# Altium PCB Buck_Converter.PcbDoc (part 1 of 2)
Units mm, origin at the board's own origin, x right, y up, seen from the top; angles counter-clockwise.
Board outline 33.25 x 45.75 mm, 2 copper layers (Top Layer, Bottom Layer); 30 components, 13 nets, 71 pads, 22 vias.
Unrouted connection lines stored in the file: 25.
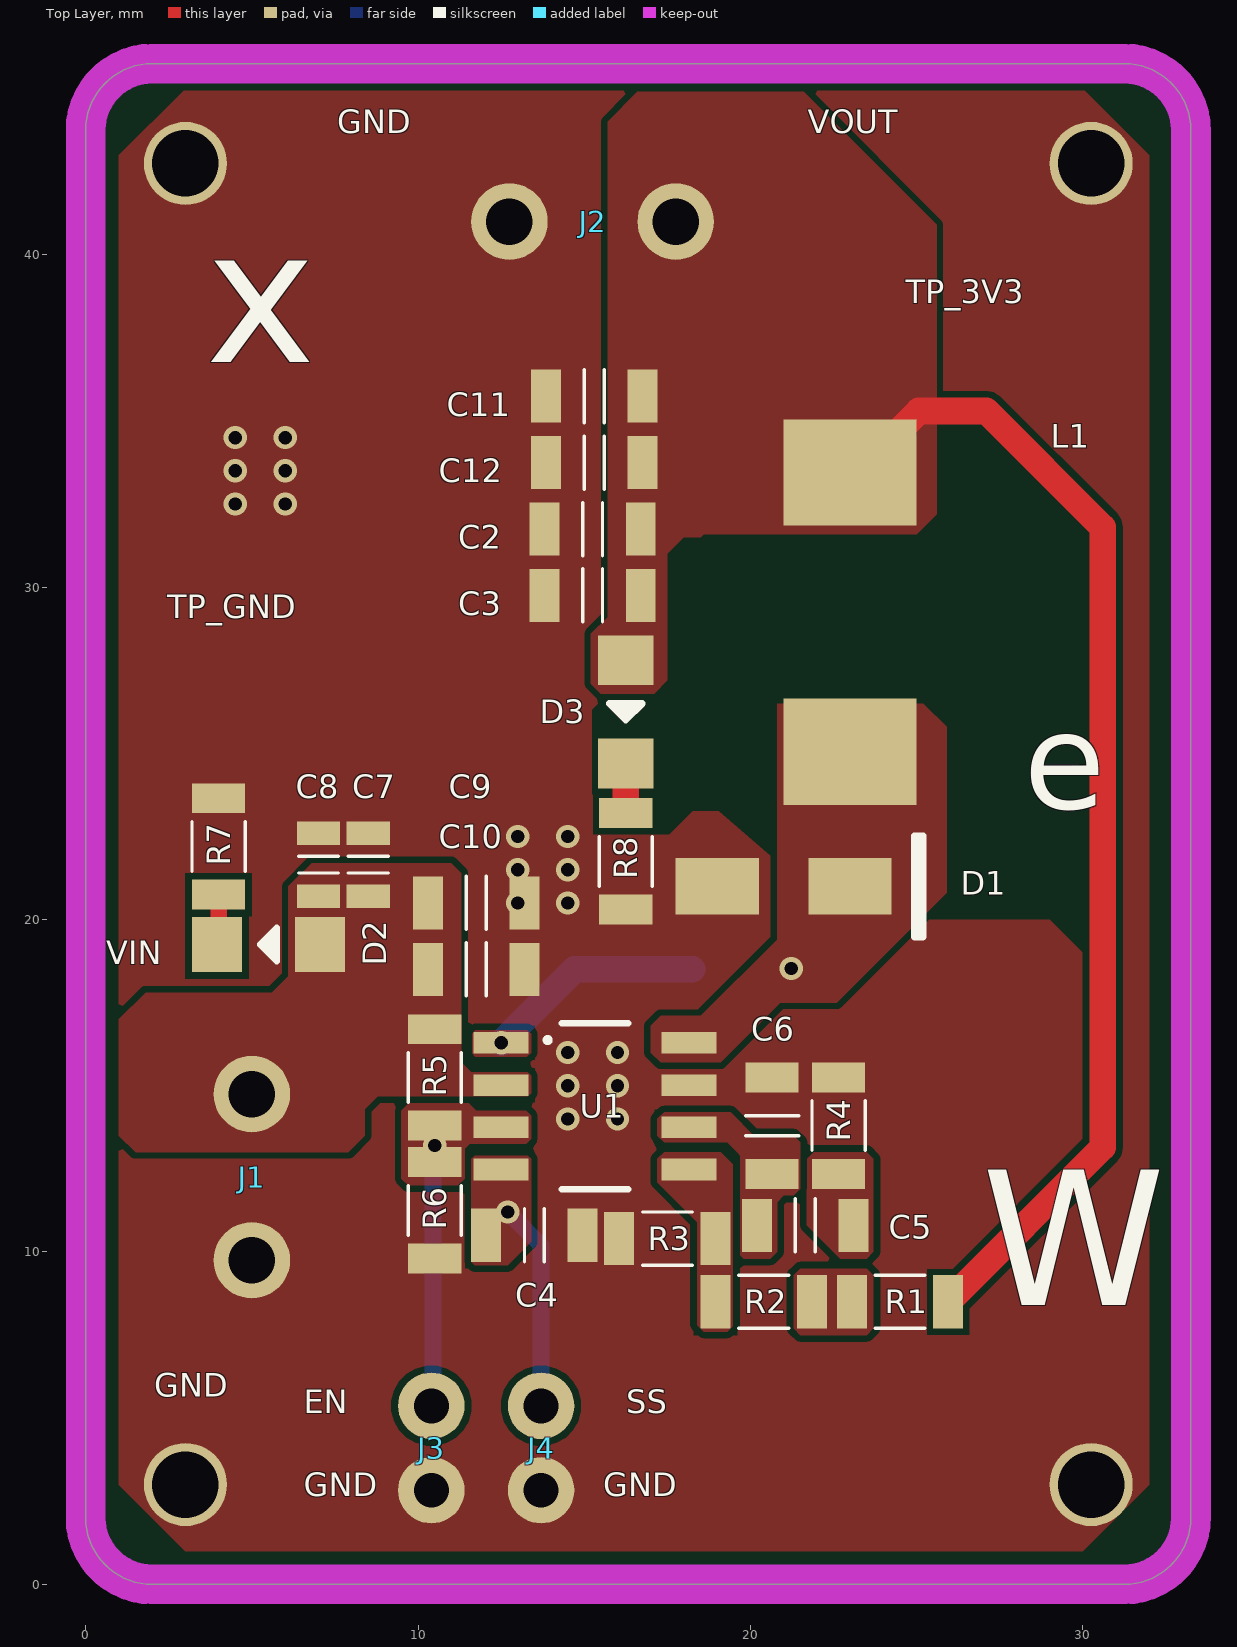
[diagram p0: Top Layer view]
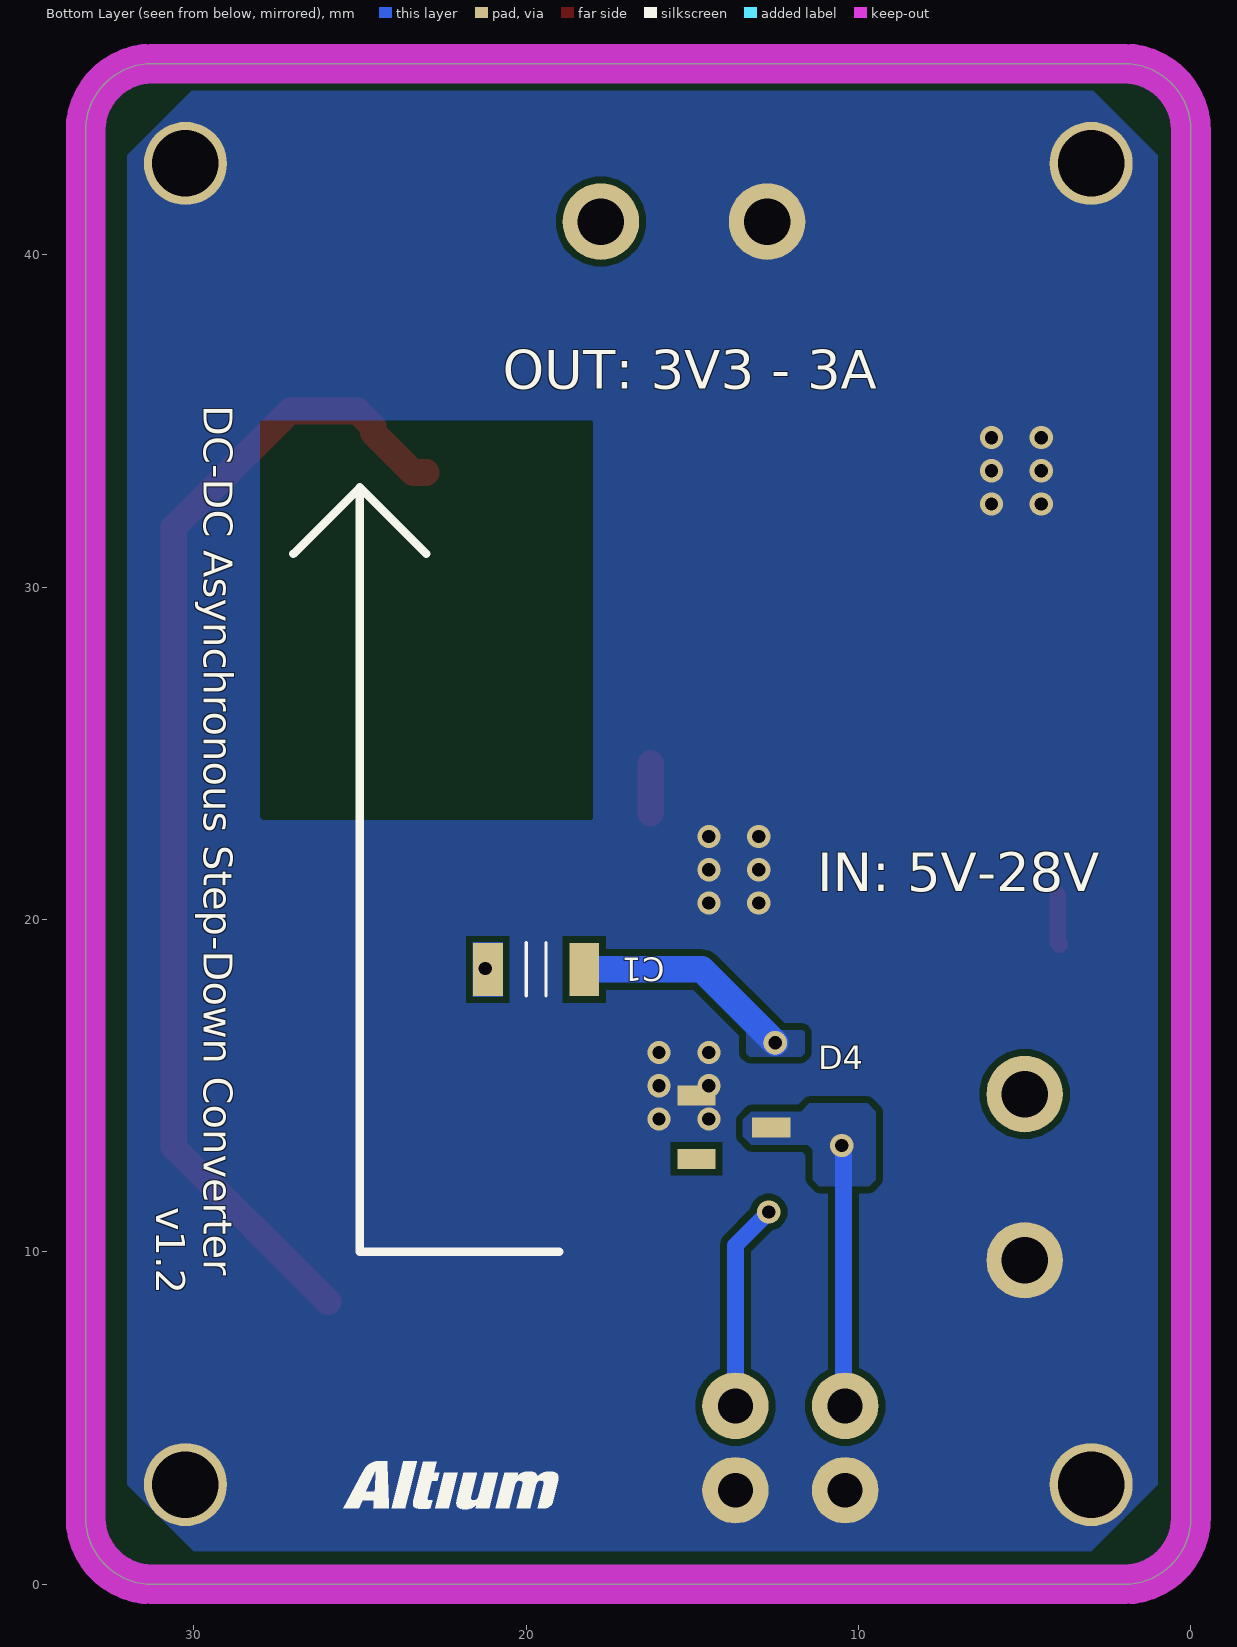
[diagram p1: Bottom Layer view, seen from below]
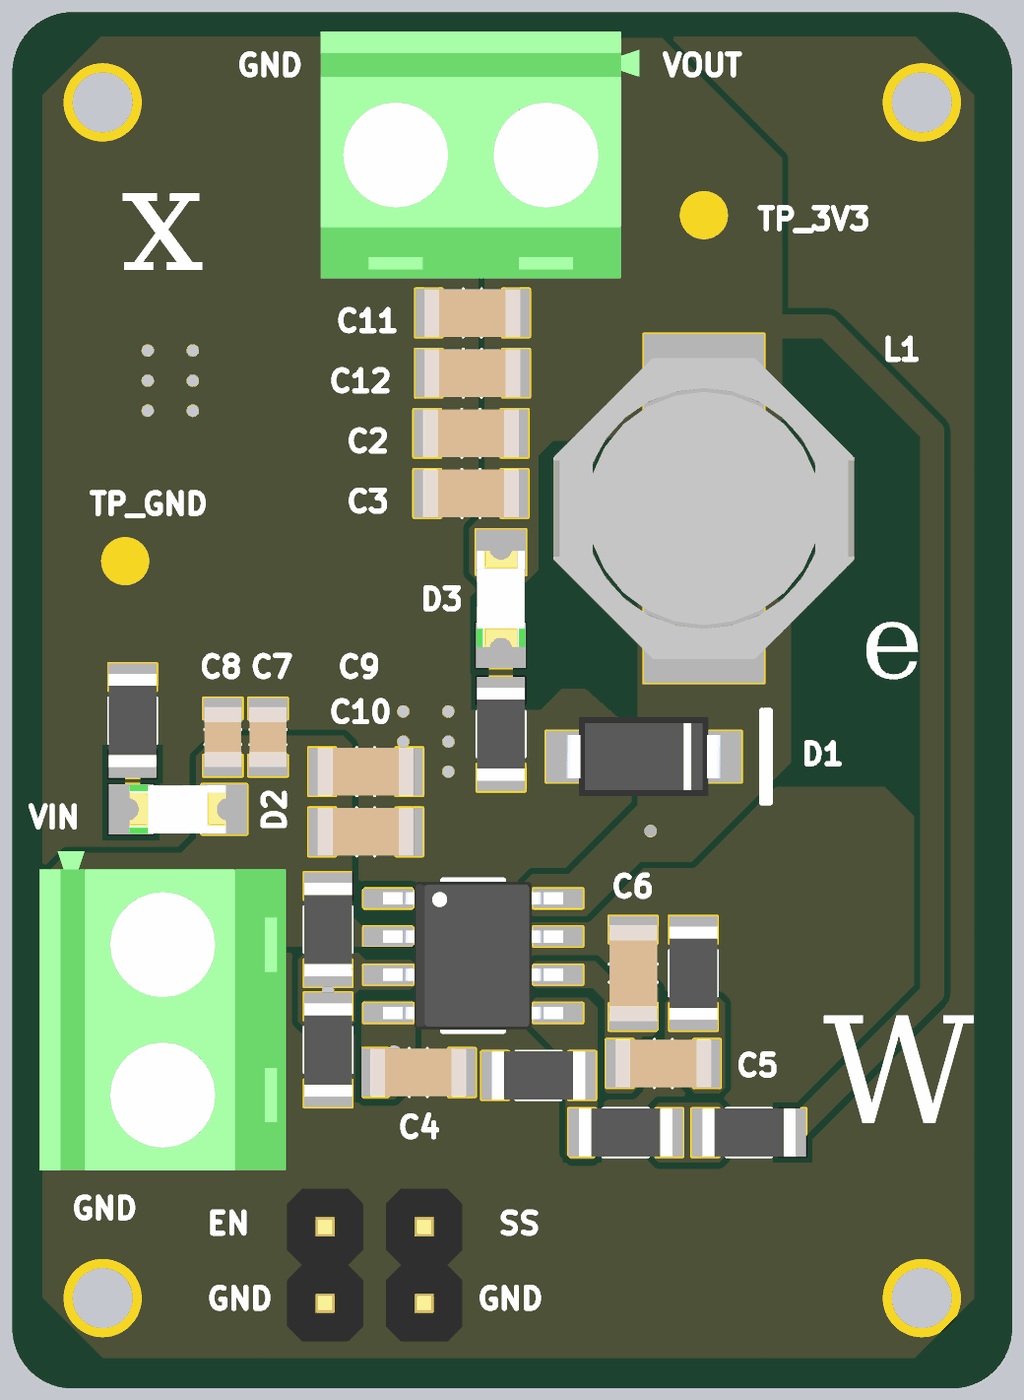
[diagram p2: 3D render of the assembled board from above, using the file's embedded part models]

## Layer stack, top to bottom
Top Solder: solder mask 0.0102, Solder Resist, Dk 3.5
Top Layer: signal copper 0.0356
Dielectric 1: dielectric 0.32, FR-4, Dk 4.8
Bottom Layer: signal copper 0.0356
Bottom Solder: solder mask 0.0102, Solder Resist, Dk 3.5

## Board outline
0,2 0,43.75 cw(c2,43.75) 2,45.75 31.25,45.75 cw(c31.25,43.75) 33.25,43.75 33.25,2 cw(c31.25,2) 31.25,0 2,0 cw(c2,2)

## Design rules (kind name [scope] priority, off if disabled: settings)
Clearance [All] p1: gap=0.2 ignorepadtopadclearanceinfootprint=FALSE except(0.35: Arc-THPad Track-THPad)
ComponentClearance [All] p1: gap=0 collisioncheckmode=3 verticalgap=0 showdistances=FALSE donotcheckwithout3dbody=TRUE
HoleSize [All] p1: absolutevalues=TRUE maxlimit=6.3 minlimit=0.15 maxpercent=80.000 minpercent=20.000
MinimumAnnularRing [All] p1: minimumring=0.15
MinimumSolderMaskSliver [All] p1: minsoldermaskwidth=0.1
PlaneClearance [All] p1: clearance=0.3
PlaneConnect [All] p1: planeconnectstyle=Direct reliefexpansion=0.508 reliefentries=4 reliefconductorwidth=0.254 reliefairgap=0.254
PolygonConnect [All] p1: connectstyle=Direct reliefconductorwidth=0.254 reliefentries=4 polygonreliefangle="90 Angle" airgapwidth=0.254
RoutingVias [All] p1: holewidth=0.5 width=0.65 viastyle="Through Hole" minholewidth=0.2 minwidth=0.35 maxholewidth=2 maxwidth=0.35
SilkToSilkClearance [All] p1: silktosilkclearance=0.3
SilkToSolderMaskClearance [IsPad] p1: minsilkscreentomaskgap=0.2 clearancetoexposedcopper=TRUE
SolderMaskExpansion [All] p1: expansion=0.05 istentingtop=FALSE
UnRoutedNet [All] p1: checkbadconnections=TRUE
Width [All] p1: maxlimit=50 minlimit=0.16 preferedwidth=10 minimp=50.000000 maximp=50.000000 favimp=50.000000
22 further rules are at their usual default settings.

## Components (designator, comment, footprint, x,y, rotation, side; value= is the part's Value field where it differs from the comment)
C1 "C1206C104J5RAC7800" CAP_1206 19.7,18.5 r0 bottom
C2 "GMC31X5R476M25NT" CAP_1206 15.25,31.75 r0 top
C3 "GMC31X5R476M25NT" CAP_1206 15.25,29.75 r0 top
C4 "C3216C0G2J103J160AA" CAP_1206 13.5,10.5 r180 top
C5 "C3216C0G2J102J085AA" CAP_1206 21.65,10.8 r180 top
C6 "C1206C470J5GAC7800" CAP_1206 20.65,13.8 r270 top
C7 "CL21A475KAQNNNE" CAP_0805 8.5,21.65 r270 top
C8 "CL21A475KAQNNNE" CAP_0805 7,21.65 r270 top
C9 "C1206C104J5RAC7800" CAP_1206 11.75,20.5 r180 top
C10 "C3216C0G2J103J160AA" CAP_1206 11.75,18.5 r180 top
C11 "C1206C104J5RAC7800" CAP_1206 15.3,35.75 r0 top
C12 "C3216C0G2J103J160AA" CAP_1206 15.3,33.75 r0 top
D1 "B340AE-13" SMA 21,21 r0 top
D2 "150120BS75000" LED_BLUE_1206 5.5,19.25 r0 top
D3 "150120GS75000" LED_GREEN_1206 16.25,26.25 r90 top
D4 "DIODE ZENER 5.1V 300MW SOT23" SOT-23 13.75,13.75 r180 bottom
J1 "282836-2" TERMINAL 5,12.25 r90 top
J2 "282836-2" TERMINAL 15.25,41 r0 top
J3 "2x1 Male Header 2.54mm" "2x1 Male Header 2.54mm" 10.4,4.1 r90 top
J4 "2x1 Male Header 2.54mm" "2x1 Male Header 2.54mm" 13.7,4.1 r90 top
L1 "SRI1004" IND_1010 23,29.25 r90 top
R1 "PMR18EZPJ000" RES_1206 24.5,8.5 r0 top
R2 "RC1206FR-0710K2L" RES_1206 20.4,8.5 r0 top
R3 "RC1206FR-073K24L" RES_1206 17.5,10.4 r0 top
R4 "RES 33K OHM 5% 1/4W 1206" RES_1206 22.65,13.8 r270 top
R5 "RC1206JR-07100KL" RES_1206 10.5,15.25 r90 top
R6 "RES 47K OHM 5% 1/4W 1206" RES_1206 10.5,11.25 r90 top
R7 "RC1206JR-0710KL" RES_1206 4,22.2 r270 top
R8 "RC1206JR-0710KL" RES_1206 16.25,21.75 r90 top
U1 "IC REG BUCK ADJ 3A 8SOIC" SOIC8_PAD 15.325,14.385 r0 top

## Footprints (in the part's own frame and the unit in brackets; to place one, negate y for a bottom-side part, rotate by r counter-clockwise, add the part's x,y. Pads: shape width x height; smd on the part's side, far side on the other; paste and mask are expansions set on the pad)
"2x1 Male Header 2.54mm" [mm]
  round 2 hole 1.05 mask+0.05: 1(-1.27,0) 2(1.27,0)
  body extent -2.54,-1.27 2.54,1.27, height 8.54
CAP_0805 [mm]
  rect 0.7x1.3 smd mask+0.05: 1(-0.95,0) 2(0.95,0)
  silkscreen extent -0.25,-0.6 0.25,0.6, body extent -1,-0.63 1,0.63, height 0.6
CAP_1206 [mm]
  rect 0.9x1.6 smd mask+0.05: 1(-1.45,0) 2(1.45,0)
  silkscreen extent -0.3,-0.8 0.3,0.8, body extent -1.6,-0.8 1.6,0.8, height 0.79
IND_1010 [mm] "10.00 x 10.00 x 4.50mm"
  rect 3.2x4 smd mask+0.05: 1(-4.2,0) 2(4.2,0)
  body extent -5,-5 5,5, height 3.8
LED_BLUE_1206 [mm]
  rect 1.5x1.66 smd mask+0.05: 1(-1.55,0) 2(1.55,0)
  silkscreen extent -0.25,-0.5 0.25,0.5, body extent -1.6,-0.8 1.6,0.8, height 0.68
LED_GREEN_1206 [mm]
  rect 1.5x1.66 smd mask+0.05: 1(-1.55,0) 2(1.55,0)
  silkscreen extent -0.25,-0.5 0.25,0.5, body extent -1.6,-0.8 1.6,0.8, height 0.68
RES_1206 [mm]
  rect 0.9x1.6 smd mask+0.05: 1(-1.45,0) 2(1.45,0)
  silkscreen extent -0.75,-0.8 0.75,0.8, body extent -1.55,-0.8 1.55,0.8, height 0.65
SMA [mm]
  rect 2.5x1.7 smd mask+0.05: 1(-2,0) 2(2,0)
  silkscreen extent 3.94,-1.52 4.19,1.52, body extent -2.6,-1.3 2.6,1.3, height 2.4
SOIC8_PAD [mm] "SOIC, 8-Leads, Body 4,90x3,90mm, Pitch 1,27mm, Thermal Pad 3,45x2,56mm, IPC Low Density"
  rect 1.65x0.65 smd: 1(-2.825,1.905) 2(-2.825,0.635) 3(-2.825,-0.635) 4(-2.825,-1.905) 5(2.825,-1.905) 6(2.825,-0.635) 7(2.825,0.635) 8(2.825,1.905)
  silkscreen extent -1,-2.5 1,2.5, body extent -3,-2.45 3,2.45, height 1.75
SOT-23 [mm]
  rect 1.15x0.6 smd: 1(-1.125,0.95) 2(-1.125,-0.95) 3(1.125,0)
  body extent -1.13,-1.5 1.13,1.5, height 1.2
TERMINAL [mm] "5MM"
  round 2.3 hole 1.4 mask+0.05: 1(-2.5,0) 2(2.5,0)
  body extent -5,-4.1 5.6,4.1, height 10

## Part data
C1 C9 C11: library part "CAP CER 100nF 1206", "CAP CER 0.1UF 50V X7R 1206", Capacitance=100nF, Case Code (Metric)=3216, Case Code (Imperial)=1206, Dielectric=X7R, Manufacturer="Kyocera AVX", Manufacturer Part Number=12065C104JAT2A, Max Operating Temperature=125°C, Min Operating Temperature=-55°C, Package Quantity=4000, Supplier Part Number 1=1441626, Tolerance=5%, Voltage Rating=50V, Case/Package=1206, Category="Ceramic Capacitors", ComponentLink1Description=https://datasheet.ciiva.com/26915/getdatasheetpartid-87553-26915356.pdf?src-supplier=Verical, ComponentLink1URL=https://datasheet.ciiva.com/26915/getdatasheetpartid-87553-26915356.pdf?src-supplier=Verical, ComponentLink2Description=https://datasheet.ciiva.com/27747/740463-27747550.pdf?src-supplier=Jameco, ComponentLink2URL=https://datasheet.ciiva.com/27747/740463-27747550.pdf?src-supplier=Jameco, ComponentLink3Description=https://datasheet.ciiva.com/7094/1818074-7094222.pdf?src-supplier=Newark, ComponentLink3URL=https://datasheet.ciiva.com/7094/1818074-7094222.pdf?src-supplier=Newark, ComponentLink4Description=https://datasheet.ciiva.com/11463/cx7r-11463226.pdf?src-supplier=Avnet, ComponentLink4URL=https://datasheet.ciiva.com/11463/cx7r-11463226.pdf?src-supplier=Avnet, ComponentLink5Description=https://datasheet.ciiva.com/16318/cx7r-16318250.pdf?src-supplier=Future+Electronics, ComponentLink5URL=https://datasheet.ciiva.com/16318/cx7r-16318250.pdf?src-supplier=Future+Electronics, ComponentLink6Description=https://datasheet.ciiva.com/11505/cx7r-11505336.pdf?src-supplier=Avnet, ComponentLink6URL=https://datasheet.ciiva.com/11505/cx7r-11505336.pdf?src-supplier=Avnet, ComponentLink7Description=https://datasheet.ciiva.com/7833/84526-7833657.pdf?src-supplier=Element14, ComponentLink7URL=https://datasheet.ciiva.com/7833/84526-7833657.pdf?src-supplier=Element14, ComponentLink8Description=https://datasheet.ciiva.com/8081/1679506-8081368.pdf?src-supplier=Element14, ComponentLink8URL=https://datasheet.ciiva.com/8081/1679506-8081368.pdf?src-supplier=Element14, ComponentLink9Description=https://datasheet.ciiva.com/7833/cx7r-7833399.pdf?src-supplier=Element14, ComponentLink9URL=https://datasheet.ciiva.com/7833/cx7r-7833399.pdf?src-supplier=Element14, ComponentLink10Description=https://datasheet.ciiva.com/152/cx7r-152041.pdf?src-supplier=Digikey, ComponentLink10URL=https://datasheet.ciiva.com/152/cx7r-152041.pdf?src-supplier=Digikey, ComponentLink11Description=https://datasheet.ciiva.com/152/cx7r-152040.pdf?src-supplier=Digikey, ComponentLink11URL=https://datasheet.ciiva.com/152/cx7r-152040.pdf?src-supplier=Digikey, ComponentLink12Description=https://datasheet.ciiva.com/152/cx7r-152042.pdf?src-supplier=Digikey, ComponentLink12URL=https://datasheet.ciiva.com/152/cx7r-152042.pdf?src-supplier=Digikey, ComponentLink13Description=https://datasheet.ciiva.com/14604/70001075-14604380.pdf?src-supplier=Allied+Electronics, ComponentLink13URL=https://datasheet.ciiva.com/14604/70001075-14604380.pdf?src-supplier=Allied+Electronics, DesignedBy="Aslı Kurt", Height=0.5mm, Lead Free=5697LeadFree, Length=3.2mm, Material=4241ConductorMaterial, Mount="Surface Mount", Packaging="Cut Tape", Pricing 1="4000=0,049, 12000=0,048 (GBP)", Pricing 2="4000=0,04296 (USD)", Pricing 3="4000=0,0373, 12000=0,0364, 20000=0,036, 60000=0,0351, 100000=0,0344 (USD)", Pricing 4="1=0,22, 10=0,105, 50=0,105, 100=0,066, 1000=0,062, 10000=0,041 (USD)", RoHS=Yes, RoHS Compliant=Yes, Series=-, Stock 1=8700, Stock 2=40000, Stock 3=916000, Stock 4=79343, Supplier 1=Rs, Supplier 2=Avnet, Supplier 3="Future Electronics", Supplier 4=Mouser, Supplier Part Number 2=KGM31BR71H104JT, Supplier Part Number 3=1247949, Supplier Part Number 4=581-12065C104J, Termination=SMD/SMT, Voltage Rating (DC)=50V, Weight=0.000571oz, Width=1.6mm
C2 C3: library part "CAP CER 47uF 1206", "CAP CER 47UF 25V X5R 1206", Capacitance=47uF, Case/Package=1206, Manufacturer="Cal-Chip Electronics", Max Operating Temperature=85°C, Min Operating Temperature=-55°C, Supplier Part Number 1=4713-GMC31X5R476M25NTCT-ND, Tolerance=20%, Voltage Rating=25V, Category="Ceramic Capacitors", ComponentLink1Description=http://www.calchipelectronics.com/pdf/gmc_series.pdf?src-supplier=Digikey, ComponentLink1URL=http://www.calchipelectronics.com/pdf/gmc_series.pdf?src-supplier=Digikey, DesignedBy="Aslı Kurt", Manufacturer Part Number=GMC31X5R476M25NT, Mount="Surface Mount", Pricing 1="1=0,99, 10=0,613, 50=0,4602, 100=0,4126, 500=0,33138, 1000=0,30602 (USD)", Pricing 2="1=0,99, 10=0,613, 50=0,4602, 100=0,4126, 500=0,33138, 1000=0,30602 (USD)", Pricing 3="2000=0,28788, 4000=0,27032, 6000=0,26149, 10000=0,25165, 14000=0,24588, 20000=0,24032 (USD)", RoHS=Yes, Series=GMC, Stock 1=38887, Stock 2=38887, Stock 3=38000, Supplier 1=Digikey, Supplier 2=Digikey, Supplier 3=Digikey, Supplier Part Number 2=4713-GMC31X5R476M25NTDKR-ND, Supplier Part Number 3=4713-GMC31X5R476M25NTTR-ND
C4 C10 C12: library part "CAP CER 10nF 1206", "CAP CER 10nF 1206", Capacitance=10nF, Manufacturer=TDK, Supplier Part Number 1=1795135, Temperature Coefficient=30ppm/°C, Category="Ceramic Capacitors", ComponentLink1Description=http://www.mouser.com/ds/2/400/lcc_commercial_highvoltage_en-520036.pdf?src-supplier=Mouser, ComponentLink1URL=http://www.mouser.com/ds/2/400/lcc_commercial_highvoltage_en-520036.pdf?src-supplier=Mouser, ComponentLink2Description=https://datasheet.octopart.com/C3216C0G2J103J160AA-TDK-datasheet-43914167.pdf?src-supplier=Newark, ComponentLink2URL=https://datasheet.octopart.com/C3216C0G2J103J160AA-TDK-datasheet-43914167.pdf?src-supplier=Newark, ComponentLink3Description=https://product.tdk.com/info/en/documents/chara_sheet/C3216C0G2J103J160AA.pdf?src-supplier=Digikey, ComponentLink3URL=https://product.tdk.com/info/en/documents/chara_sheet/C3216C0G2J103J160AA.pdf?src-supplier=Digikey, ComponentLink4Description=https://product.tdk.com/info/en/catalog/spec/mlccspec_commercial_general_midvoltage_en.pdf?src-supplier=Digikey, ComponentLink4URL=https://product.tdk.com/info/en/catalog/spec/mlccspec_commercial_general_midvoltage_en.pdf?src-supplier=Digikey, ComponentLink5Description=http://product.tdk.com/en/catalog/datasheets/mlcc_commercial_midvoltage_en.pdf?src-supplier=Avnet, ComponentLink5URL=http://product.tdk.com/en/catalog/datasheets/mlcc_commercial_midvoltage_en.pdf?src-supplier=Avnet, ComponentLink6Description=https://datasheet.octopart.com/C3216C0G2J103J160AA-TDK-datasheet-41194876.pdf?src-supplier=Future+Electronics, ComponentLink6URL=https://datasheet.octopart.com/C3216C0G2J103J160AA-TDK-datasheet-41194876.pdf?src-supplier=Future+Electronics, DesignedBy="Aslı Kurt", Lead Free=5697LeadFree, Manufacturer Part Number=C3216C0G2J103J160AA, Material=4241ConductorMaterial, Pricing 1="2000=0,092, 6000=0,095 (GBP)", Pricing 2="1=0,53, 10=0,316, 50=0,231, 100=0,2046, 500=0,1596, 1000=0,14555 (USD)", Pricing 3="264=0,1004 (USD)", Pricing 4="1=0,405, 15=0,32, 50=0,285, 250=0,235, 1000=0,195 (USD)", RoHS=Yes, Stock 1=9940, Stock 2=35379, Stock 3=264, Stock 4=1420, Supplier 1=Rs, Supplier 2=Digikey, Supplier 3="Arrow Electronics", Supplier 4="Future Electronics", Supplier Part Number 2=445-14625-1-ND, Supplier Part Number 3=C3216C0G2J103J160AA, Supplier Part Number 4=6103616
C5: library part "CAP CER 1nF 1206", "CAP CER 1nF 1206", Capacitance=1nF, Manufacturer=TDK, Supplier Part Number 1=810-C3216C0G2J102J, Category="Ceramic Capacitors", ComponentLink1Description=https://datasheet.ciiva.com/24219/c3216c0g2j102j085aa-265301-24219668.pdf?src-supplier=Mouser, ComponentLink1URL=https://datasheet.ciiva.com/24219/c3216c0g2j102j085aa-265301-24219668.pdf?src-supplier=Mouser, ComponentLink2Description=https://datasheet.ciiva.com/11788/0900766b80fc5cba-11788148.pdf?src-supplier=Rs, ComponentLink2URL=https://datasheet.ciiva.com/11788/0900766b80fc5cba-11788148.pdf?src-supplier=Rs, ComponentLink3Description=https://datasheet.ciiva.com/7726/1484596-7726604.pdf?src-supplier=Element14, ComponentLink3URL=https://datasheet.ciiva.com/7726/1484596-7726604.pdf?src-supplier=Element14, DesignedBy="Aslı Kurt", Manufacturer Part Number=C3216C0G2J102J085AA, Material=4241ConductorMaterial, Pricing 1="1=0,26, 10=0,115, 50=0,115, 100=0,072, 1000=0,062, 10000=0,048 (USD)", Pricing 2="1=0,27, 10=0,154, 50=0,1098, 100=0,0961, 500=0,07266, 1000=0,06537 (USD)", RoHS=Yes, Stock 1=6821, Stock 2=72988, Supplier 1=Mouser, Supplier 2=Digikey, Supplier Part Number 2=445-2342-1-ND
C6: library part "CAP CER 47pF 1206", "CAP CER 47PF 50V C0G/NP0 1206", Capacitance=47pF, Case Code (Metric)=3216, Case Code (Imperial)=1206, Dielectric=C0G, Dielectric Material=Ceramic, Manufacturer=KEMET, Manufacturer Part Number=C1206C470J5GACTU, Max Operating Temperature=125°C, Min Operating Temperature=-55°C, Package Quantity=1, Supplier Part Number 1=80-C1206C470J5GACTU, Temperature Coefficient=30ppm/°C, Tolerance=5%, Voltage=50V, Case/Package=1206, Category="Ceramic Capacitors", ComponentLink1Description=https://datasheet.ciiva.com/7729/1691965-7729914.pdf?src-supplier=Element14, ComponentLink1URL=https://datasheet.ciiva.com/7729/1691965-7729914.pdf?src-supplier=Element14, ComponentLink2Description=https://datasheet.ciiva.com/7729/1691965-7729913.pdf?src-supplier=Element14, ComponentLink2URL=https://datasheet.ciiva.com/7729/1691965-7729913.pdf?src-supplier=Element14, ComponentLink3Description=https://datasheet.ciiva.com/28668/1789732-28668879.pdf?src-supplier=Element14, ComponentLink3URL=https://datasheet.ciiva.com/28668/1789732-28668879.pdf?src-supplier=Element14, ComponentLink4Description=https://datasheet.ciiva.com/14598/70095383-14598902.pdf?src-supplier=Allied+Electronics, ComponentLink4URL=https://datasheet.ciiva.com/14598/70095383-14598902.pdf?src-supplier=Allied+Electronics, ComponentLink5Description=https://datasheet.ciiva.com/14598/70095383-14598719.pdf?src-supplier=Allied+Electronics, ComponentLink5URL=https://datasheet.ciiva.com/14598/70095383-14598719.pdf?src-supplier=Allied+Electronics, ComponentLink6Description=https://datasheet.ciiva.com/11463/kem-c1003-c0g-smd-11463659.pdf?src-supplier=Avnet, ComponentLink6URL=https://datasheet.ciiva.com/11463/kem-c1003-c0g-smd-11463659.pdf?src-supplier=Avnet, ComponentLink7Description=https://datasheet.ciiva.com/2988/kem-c1003-c0g-smd-2988767.pdf?src-supplier=Avnet, ComponentLink7URL=https://datasheet.ciiva.com/2988/kem-c1003-c0g-smd-2988767.pdf?src-supplier=Avnet, Construction=Flat, Depth=1.6mm, Dissipation Factor=0.1%, Height=0.78mm, Lead Free=5697LeadFree, Length=3.2mm, Material=4241ConductorMaterial, Mount="Surface Mount,PCB", Packaging="Tape and Reel", Pricing 1="1=0,18, 10=0,089, 50=0,089, 100=0,051, 1000=0,035, 10000=0,026 (USD)", Pricing 2="500=0,022, 1000=0,019, 1500=0,017 (GBP)", Pricing 3="4000=0,0232, 8000=0,021, 24000=0,02 (USD)", Pricing 4="1=0,2, 10=0,112, 50=0,0788, 100=0,0685, 500=0,05114, 1000=0,04574 (USD)", Reach SVHC Compliant=No, RoHS=Yes, RoHS Compliant=Yes, Series=C, Stock 1=9133, Stock 2=8000, Stock 3=12000, Stock 4=41465, Supplier 1=Mouser, Supplier 2=Rs, Supplier 3="Arrow Electronics", Supplier 4=Digikey, Supplier Part Number 2=8029999, Supplier Part Number 3=C1206C470J5GACTU, Supplier Part Number 4=399-C1206C470J5GAC7800CT-ND, Termination=SMD/SMT, Thickness=0.035inch, Voltage Rating=50V, Voltage Rating (AC)=50V, Voltage Rating (DC)=50V, Width=0.063inch
C7 C8: library part "CAP CER 4.7uF 0805", "CAP CER 4.7uF %10 0805", Capacitance=4.7uF, Case Code (Metric)=2012, Case Code (Imperial)=0805, Dielectric=X5R, Manufacturer=Samsung, Max Operating Temperature=85°C, Min Operating Temperature=-55°C, Package Quantity=1, Supplier Part Number 1=1276-1244-1-ND, Tolerance=10%, Voltage Rating=25V, Case/Package=0805, Category="Ceramic Capacitors", ComponentLink1Description=https://datasheet.ciiva.com/25798/cl21a475kaqnnne-25798882.pdf?src-supplier=Digi-Key, ComponentLink1URL=https://datasheet.ciiva.com/25798/cl21a475kaqnnne-25798882.pdf?src-supplier=Digi-Key, Construction=Flat, Depth=1.25mm, Designed by=BERK, Height=1.25mm, Lead Free="Lead Free", Length=2mm, Manufacturer Part Number=CL21A475KAQNNNE, Mount="Surface Mount", Packaging="Tape and Reel", Pricing 1="1=0,11000, 10=0,08100, 50=0,04580, 100=0,03800, 500=0,02664, 1000=0,02205 (USD)", Radiation Hardening=No, RoHS=Yes, RoHS Compliant=Yes, Series=CL, Stock 1=1477018, Supplier 1=Digi-Key, Thickness=0.055inch, Voltage Rating (DC)=25V, Width=0.049inch
D1: library part B340A, "Rectifier Diode Schottky 40V 3A 2-Pin SMA T/R", Forward Current=3A, Manufacturer=Diodes, Supplier Part Number 1=B340AE-13DICT-ND, Category="Schottky Diodes", ComponentLink1Description=https://www.diodes.com/assets/Datasheets/B320AE-B345AE.pdf?src-supplier=Digikey, ComponentLink1URL=https://www.diodes.com/assets/Datasheets/B320AE-B345AE.pdf?src-supplier=Digikey, DesignedBy="Aslı Kurt", Manufacturer Part Number=B340AE-13, Pricing 1="1=0,37, 10=0,248, 100=0,1671, 500=0,1296, 1000=0,1171, 2000=0,10643 (USD)", Pricing 2="1=0,37, 10=0,248, 100=0,1671, 500=0,1296, 1000=0,1171, 2000=0,10643 (USD)", RoHS=Yes, Stock 1=232201, Stock 2=232201, Supplier 1=Digikey, Supplier 2=Digikey, Supplier Part Number 2=B340AE-13DIDKR-ND
D2: library part "LED BLUE 1206", "Led, Blue, 470 Nm, 3.2 V, 30 Ma, 145 Mcd Rohs Compliant: Yes", Case Code (Metric)=3216, Case Code (Imperial)=1206, Color=Blue, Forward Current=30mA, Forward Voltage=3.2V, Lens Color=Colorless, Manufacturer="Wurth Electronics", Max Operating Temperature=85°C, Min Operating Temperature=-40°C, Package Quantity=1, Supplier Part Number 1=8154243P, Test Current=20mA, Case/Package=1206, Category=LEDs, ComponentLink1Description=https://datasheet.ciiva.com/22656/150120bs75000-22656976.pdf?src-supplier=Element14, ComponentLink1URL=https://datasheet.ciiva.com/22656/150120bs75000-22656976.pdf?src-supplier=Element14, ComponentLink2Description=https://datasheet.ciiva.com/29279/759440-da-01-en-chipled-1206-w-kl-blau-150120bs75000-29279045.pdf?src-supplier=Conrad, ComponentLink2URL=https://datasheet.ciiva.com/29279/759440-da-01-en-chipled-1206-w-kl-blau-150120bs75000-29279045.pdf?src-supplier=Conrad, ComponentLink3Description=https://datasheet.ciiva.com/29561/150120bs75000-29561882.pdf?src-supplier=Digikey, ComponentLink3URL=https://datasheet.ciiva.com/29561/150120bs75000-29561882.pdf?src-supplier=Digikey, DesignedBy="Aslı Kurt", Dominant Wavelength=470nm, Height=0.69mm, Length=3.2mm, Lens Size=1.6mm, Lens Style=Clear,Flat,Rectangular, Lens Transparency=Clear, Luminous Intensity=145mcd, Manufacturer Part Number=150120BS75000, Mount="Surface Mount", Packaging="Cut Tape", Pricing 1="500=0,119, 750=0,113, 1500=0,11, 3000=0,104 (GBP)", Pricing 2="5=0,251, 10=0,213, 100=0,172, 500=0,156, 1000=0,153 (EUR)", Pricing 3="1=0,22, 50=0,211, 100=0,182, 500=0,158 (USD)", Pricing 4="1=0,23, 10=0,225, 50=0,211, 100=0,182, 1000=0,165, 10000=0,165 (USD)", Reach SVHC Compliant=Unknown, RoHS=Yes, RoHS Compliant=Yes, Series=WL-SMCW, Stock 1=2200, Stock 2=4482, Stock 3=25240, Stock 4=4085, Supplier 1=Rs, Supplier 2=Farnell, Supplier 3=Digikey, Supplier 4=Mouser, Supplier Part Number 2=2322084, Supplier Part Number 3=732-4989-1-ND, Supplier Part Number 4=710-150120BS75000, Viewing Angle=140°, Wavelength=470nm, Width=1.6mm
D3: library part "LED GREEN 1206", "WL-SMCW SMT Mono-Color Chip LED Waterclear", Case Code (Metric)=3216, Case Code (Imperial)=1206, Color=Green, Forward Current=30mA, Forward Voltage=3.2V, Lens Color=Colorless, Manufacturer="Wurth Electronics", Max Operating Temperature=85°C, Max Reverse Voltage (DC)=5V, Min Operating Temperature=-40°C, Package Quantity=1, Power Dissipation=105mW, Supplier Part Number 1=8154247P, Test Current=20mA, Case/Package=1206, Category=LEDs, ComponentLink1Description=https://datasheet.ciiva.com/22656/150120gs75000-22656979.pdf?src-supplier=Element14, ComponentLink1URL=https://datasheet.ciiva.com/22656/150120gs75000-22656979.pdf?src-supplier=Element14, ComponentLink2Description=https://datasheet.ciiva.com/29279/759441-da-01-en-chipled-1206-w-kl-gruen-150120gs75000-29279042.pdf?src-supplier=Conrad, ComponentLink2URL=https://datasheet.ciiva.com/29279/759441-da-01-en-chipled-1206-w-kl-gruen-150120gs75000-29279042.pdf?src-supplier=Conrad, ComponentLink3Description=https://datasheet.ciiva.com/48430/150120gs75000-eng-tds-48430053.pdf?src-supplier=Distrelec, ComponentLink3URL=https://datasheet.ciiva.com/48430/150120gs75000-eng-tds-48430053.pdf?src-supplier=Distrelec, ComponentLink4Description=https://datasheet.ciiva.com/29561/150120gs75000-29561884.pdf?src-supplier=Digikey, ComponentLink4URL=https://datasheet.ciiva.com/29561/150120gs75000-29561884.pdf?src-supplier=Digikey, ComponentLink5Description=https://datasheet.ciiva.com/29561/150120gs75000-29561883.pdf?src-supplier=Digikey, ComponentLink5URL=https://datasheet.ciiva.com/29561/150120gs75000-29561883.pdf?src-supplier=Digikey, ComponentLink6Description=https://datasheet.ciiva.com/29561/150120gs75000-29561885.pdf?src-supplier=Digikey, ComponentLink6URL=https://datasheet.ciiva.com/29561/150120gs75000-29561885.pdf?src-supplier=Digikey, DesignedBy="Aslı Kurt", Dominant Wavelength=520nm, Height=0.69mm, Length=3.2mm, Lens Size=1.6mm, Lens Style=Clear,Flat,Rectangular, Lens Transparency=Clear, Luminous Intensity=450mcd, Manufacturer Part Number=150120GS75000, Mount="Surface Mount", Packaging="Cut Tape", Pricing 1="500=0,119, 750=0,113, 1500=0,11, 3000=0,104 (GBP)", Pricing 2="100=0,172, 500=0,156, 1000=0,153 (EUR)", Pricing 3="1=0,23, 10=0,225, 50=0,211, 100=0,182, 1000=0,165, 10000=0,165 (USD)", Pricing 4="1=0,22, 50=0,211, 100=0,182, 500=0,158 (USD)", Reach SVHC Compliant=Unknown, Reverse Voltage=5V, RoHS=Yes, RoHS Compliant=Yes, Series=WL-SMCW, Stock 1=4450, Stock 2=6145, Stock 3=4986, Stock 4=22547, Supplier 1=Rs, Supplier 2=Farnell, Supplier 3=Mouser, Supplier 4=Digikey, Supplier Part Number 2=2322085RL, Supplier Part Number 3=710-150120GS75000, Supplier Part Number 4=732-4990-1-ND, Viewing Angle=140°, Wavelength=520nm, Width=1.6mm
D4: library part BZX84C5V1, "DIODE ZENER 5.1V 225MW SOT23-3 / Zener Diode Single 5.1V 5% 60Ohm 300mW 3-Pin SOT-23 T/R", Breakdown Voltage=5.4V, Case/Package=SOT-23-3, Forward Current=10mA, Forward Voltage=900mV, Manufacturer=onsemi, Manufacturer Lifecycle Status=ACTIVE, Manufacturer Part Number=BZX84C5V1LT1G, Max Junction Temperature (Tj)=150°C, Max Power Dissipation=250mW, Max Reverse Leakage Current=2µA, Min Operating Temperature=-65°C, Power Dissipation=300mW, Power Rating=225mW, Reference Voltage=5.1V, Reverse Voltage=2V, Supplier Part Number 1=3458338, Test Current=5mA, Tolerance=6%, Voltage Tolerance=5.88%, Category="Zener Diodes", China RoHS=Compliant, ComponentLink1Description=https://datasheet.octopart.com:443/BZX84C5V1LT1G-ON-Semiconductor-datasheet-12511411.pdf?src-supplier=Master+Electronics, ComponentLink1URL=https://datasheet.octopart.com:443/BZX84C5V1LT1G-ON-Semiconductor-datasheet-12511411.pdf?src-supplier=Master+Electronics, ComponentLink2Description=https://datasheet.octopart.com:443/BZX84C5V1LT1G-ON-Semiconductor-datasheet-6396728.pdf?src-supplier=Upverter, ComponentLink2URL=https://datasheet.octopart.com:443/BZX84C5V1LT1G-ON-Semiconductor-datasheet-6396728.pdf?src-supplier=Upverter, ComponentLink3Description=https://datasheet.octopart.com:443/BZX84C5V1LT1G-ON-Semiconductor-datasheet-153443.pdf?src-supplier=Upverter, ComponentLink3URL=https://datasheet.octopart.com:443/BZX84C5V1LT1G-ON-Semiconductor-datasheet-153443.pdf?src-supplier=Upverter, ComponentLink4Description=https://sigma.octopart.com:443/138897241/technical_drawing/ON-Semiconductor-BZX84C5V1LT1G.pdf?src-supplier=Upverter, ComponentLink4URL=https://sigma.octopart.com:443/138897241/technical_drawing/ON-Semiconductor-BZX84C5V1LT1G.pdf?src-supplier=Upverter, ComponentLink5Description=https://datasheet.octopart.com:443/BZX84C5V1LT1G-onsemi-datasheet-180958179.pdf?src-supplier=IHS, ComponentLink5URL=https://datasheet.octopart.com:443/BZX84C5V1LT1G-onsemi-datasheet-180958179.pdf?src-supplier=IHS, ComponentLink6Description=https://datasheet.octopart.com:443/BZX84C5V1LT1G-ON-Semiconductor-datasheet-78758887.pdf?src-supplier=Newark, ComponentLink6URL=https://datasheet.octopart.com:443/BZX84C5V1LT1G-ON-Semiconductor-datasheet-78758887.pdf?src-supplier=Newark, ComponentLink7Description=https://datasheet.octopart.com:443/BZX84C5V1LT1G-ON-Semiconductor-datasheet-21210846.pdf?src-supplier=Newark, ComponentLink7URL=https://datasheet.octopart.com:443/BZX84C5V1LT1G-ON-Semiconductor-datasheet-21210846.pdf?src-supplier=Newark, ComponentLink8Description=https://datasheet.octopart.com:443/BZX84C5V1LT1G-ON-Semiconductor-datasheet-10979668.pdf?src-supplier=element14+APAC, ComponentLink8URL=https://datasheet.octopart.com:443/BZX84C5V1LT1G-ON-Semiconductor-datasheet-10979668.pdf?src-supplier=element14+APAC, ComponentLink9Description=https://datasheet.octopart.com:443/BZX84C5V1LT1G-ON-Semiconductor-datasheet-34436524.pdf?src-supplier=Farnell, ComponentLink9URL=https://datasheet.octopart.com:443/BZX84C5V1LT1G-ON-Semiconductor-datasheet-34436524.pdf?src-supplier=Farnell, ComponentLink10Description=https://datasheet.octopart.com:443/BZX84C5V1LT1G-onsemi-datasheet-188912630.pdf?src-supplier=TME, ComponentLink10URL=https://datasheet.octopart.com:443/BZX84C5V1LT1G-onsemi-datasheet-188912630.pdf?src-supplier=TME, ComponentLink11Description=https://datasheet.octopart.com:443/BZX84C5V1LT1G-ON-Semiconductor-datasheet-14050930.pdf?src-supplier=iiiC, ComponentLink11URL=https://datasheet.octopart.com:443/BZX84C5V1LT1G-ON-Semiconductor-datasheet-14050930.pdf?src-supplier=iiiC, ComponentLink12Description=https://datasheet.octopart.com:443/BZX84C5V1LT1G-ON-Semiconductor-datasheet-9574943.pdf?src-supplier=RS+(Formerly+Allied+Electronics), ComponentLink12URL=https://datasheet.octopart.com:443/BZX84C5V1LT1G-ON-Semiconductor-datasheet-9574943.pdf?src-supplier=RS+(Formerly+Allied+Electronics), ComponentLink13Description=https://datasheet.octopart.com:443/BZX84C5V1LT1G-ON-Semiconductor-datasheet-8441908.pdf?src-supplier=Jameco, ComponentLink13URL=https://datasheet.octopart.com:443/BZX84C5V1LT1G-ON-Semiconductor-datasheet-8441908.pdf?src-supplier=Jameco, ComponentLink14Description=http://sigma.octopart.com:80/15540786/rohs_certificate/ON-Semiconductor-BZX84C5V1LT1G.pdf?src-supplier=Compliance+Statements, ComponentLink14URL=http://sigma.octopart.com:80/15540786/rohs_certificate/ON-Semiconductor-BZX84C5V1LT1G.pdf?src-supplier=Compliance+Statements, ComponentLink15Description=http://sigma.octopart.com:80/15674468/materials_sheet/ON-Semiconductor-BZX84C5V1LT1G.csv?src-supplier=Compliance+Statements, ComponentLink15URL=http://sigma.octopart.com:80/15674468/materials_sheet/ON-Semiconductor-BZX84C5V1LT1G.csv?src-supplier=Compliance+Statements, ComponentLink16Description=http://sigma.octopart.com:80/150606140/rohs_statement/ON-Semiconductor-BZX84C5V1LT1G.pdf?src-supplier=Compliance+Statements, ComponentLink16URL=http://sigma.octopart.com:80/150606140/rohs_statement/ON-Semiconductor-BZX84C5V1LT1G.pdf?src-supplier=Compliance+Statements, ComponentLink17Description=http://sigma.octopart.com:80/reach_statement/ON-Semiconductor-company-79.pdf?src-supplier=Compliance+Statements, ComponentLink17URL=http://sigma.octopart.com:80/reach_statement/ON-Semiconductor-company-79.pdf?src-supplier=Compliance+Statements, ComponentLink18Description=https://octopart.com:443/opatz8j6/c1?t=rYC5pmPZabTi72ZYwFB7P_PN208N2lIp2VvimPhAF1z3KaC5dTlpCLR51yrX09_55QTavXw1C5Vmav0RqzcH63jlVxqKVKhwnJ-0OOeDvw0fWI_28OExF_ygP2nIOAqkbgAom3QDGs1sPbdqLqkt8Eusqxl0iJPuI-95k8Tm65V4fyjSeVcD_-LiplYFShim0H_u_gifR358F7yu-hXxycHh5-jhEY1hyZ9nIjH6PVedsPkhIpRCDICcX7gOaqvz45RF5hle4BB_Ykn_LPmN14u6BTq3--9DeYakYxYUJcbze7ltFwQVIlp_HowXavffc5CMjBdJGHypeAykXsZoJtkZ4Qzgq_3YQEWv1Cqd_g&src-supplier=Compliance+Statements, ComponentLink18URL=https://octopart.com:443/opatz8j6/c1?t=rYC5pmPZabTi72ZYwFB7P_PN208N2lIp2VvimPhAF1z3KaC5dTlpCLR51yrX09_55QTavXw1C5Vmav0RqzcH63jlVxqKVKhwnJ-0OOeDvw0fWI_28OExF_ygP2nIOAqkbgAom3QDGs1sPbdqLqkt8Eusqxl0iJPuI-95k8Tm65V4fyjSeVcD_-LiplYFShim0H_u_gifR358F7yu-hXxycHh5-jhEY1hyZ9nIjH6PVedsPkhIpRCDICcX7gOaqvz45RF5hle4BB_Ykn_LPmN14u6BTq3--9DeYakYxYUJcbze7ltFwQVIlp_HowXavffc5CMjBdJGHypeAykXsZoJtkZ4Qzgq_3YQEWv1Cqd_g&src-supplier=Compliance+Statements, ComponentLink19Description=https://octopart.com:443/opatz8j6/c1?t=TauGXXtfN9TZMzbqnFgYqFgPrr_i-1CV4QUXGXpM6Z3YY-bbXc1a00HUR5RDaU3TUMGAF4--frbYMZDlJs6-zN5q9VOrAuD4YP5DDCTy6ahukOVlWeGxRos4gkamdeJpRdUP1XfRxLxwwDgUI3KdwL6GerHRXlvDDxysKdqv_8ElcOkR3Pg18GoxeOWWJJjcoeYPaIzuzLbGZdcSrkrruHbXAiGXejGu6ddMBkxqGsMA0HJBGJ3y_1OxA7fVow3qDkESSg29liskN03U6HhjltaQNesqrYRy7qRDwjHfrw8Uo4P9ws7AoqnkkGfGyopoAkmOlPRFV82BTtEf6E4U9EWE4d0MLafxrEMmRkFm&src-supplier=Compliance+Statements, ComponentLink19URL=https://octopart.com:443/opatz8j6/c1?t=TauGXXtfN9TZMzbqnFgYqFgPrr_i-1CV4QUXGXpM6Z3YY-bbXc1a00HUR5RDaU3TUMGAF4--frbYMZDlJs6-zN5q9VOrAuD4YP5DDCTy6ahukOVlWeGxRos4gkamdeJpRdUP1XfRxLxwwDgUI3KdwL6GerHRXlvDDxysKdqv_8ElcOkR3Pg18GoxeOWWJJjcoeYPaIzuzLbGZdcSrkrruHbXAiGXejGu6ddMBkxqGsMA0HJBGJ3y_1OxA7fVow3qDkESSg29liskN03U6HhjltaQNesqrYRy7qRDwjHfrw8Uo4P9ws7AoqnkkGfGyopoAkmOlPRFV82BTtEf6E4U9EWE4d0MLafxrEMmRkFm&src-supplier=Compliance+Statements, Contact Plating=Tin, DesignedBy="Aslı Kurt", Element Configuration=Single, ESD Protection=Yes, Halogen Free="Halogen Free", Height=1.11mm, Lead Free="Lead Free", Length=3.0226mm, Lifecycle Status=Production, Material=Plastic, Max Operating Temperature=150°C, Number of Elements=1, Number of Pins=3, Number of Terminals=3, Packaging="Tape and Reel", Peak Reverse Current=2µA, Polarity=Unidirectional, Pricing 1="3000=0,0111, 9000=0,0109, 30000=0,0106, 60000=0,0105, 120000=0,0102 (USD)", Pricing 2="3000=0,0111, 9000=0,0109, 30000=0,0106, 60000=0,0105, 120000=0,0102 (USD)", Pricing 3="5=0,108, 50=0,0573, 100=0,0286, 500=0,0277, 1500=0,0266 (EUR)", Pricing 4="1=0,115, 25=0,061, 50=0,047, 100=0,032, 250=0,031 (USD)", Pricing 5="1=0,11, 10=0,058, 50=0,058, 100=0,029, 1000=0,027, 10000=0,014 (USD)", Pricing 6="1=0,011, 50=0,011, 100=0,011, 250=0,011, 500=0,011, 1000=0,011 (USD)", Radiation Hardening=No, REACH SVHC=Yes, RoHS=Compliant, Schedule B="8541100050, 8541100050|8541100050|8541100050|8541100050|8541100050", Stock 1=699000, Stock 2=510000, Stock 3=63332, Stock 4=24715, Stock 5=44658, Stock 6=24404, Supplier 1="Future Electronics", Supplier 2="Future Electronics", Supplier 3=Farnell, Supplier 4=Avnet, Supplier 5=Mouser, Supplier 6=Newark, Supplier Part Number 2=7190557, Supplier Part Number 3=1459052, Supplier Part Number 4=88H4589, Supplier Part Number 5=863-BZX84C5V1LT1G, Supplier Part Number 6=88H4589, Voltage Rating (DC)=5.1V, Width=1.397mm, Working Voltage=5.1V, Zener Current=5mA, Zener Voltage=5.1V, Impedance=60Ω
J1 J2: library part "2x1 TERMINAL 5mm", "Connector, Terminal Block; Wire Receptacle; 2 Pos.; 16-30 AWG; 0.197 in. CL; Sid", Color=Green, Current=13.5A, Flammability Rating="UL94 V-0", Manufacturer="TE Connectivity", Max Operating Temperature=105°C, Max Supply Voltage (AC)=300V, Min Operating Temperature=-40°C, Package Quantity=300, Supplier Part Number 1=A98076-ND, Voltage Rating (DC)=250V, Approvals=UL, Category="Terminal Blocks", Closed End="No (Without)", ComponentLink1Description=https://datasheet.ciiva.com/7628/1731782-7628513.pdf?src-supplier=Element14, ComponentLink1URL=https://datasheet.ciiva.com/7628/1731782-7628513.pdf?src-supplier=Element14, ComponentLink2Description=https://datasheet.ciiva.com/16393/282836-2-16393382.pdf?src-supplier=Future+Electronics, ComponentLink2URL=https://datasheet.ciiva.com/16393/282836-2-16393382.pdf?src-supplier=Future+Electronics, ComponentLink3Description=https://datasheet.ciiva.com/15169/getdatasheetpartid-155855-15169553.pdf?src-supplier=Verical, ComponentLink3URL=https://datasheet.ciiva.com/15169/getdatasheetpartid-155855-15169553.pdf?src-supplier=Verical, ComponentLink4Description=https://datasheet.ciiva.com/11757/0900766b8002dc8a-11757385.pdf?src-supplier=Rs, ComponentLink4URL=https://datasheet.ciiva.com/11757/0900766b8002dc8a-11757385.pdf?src-supplier=Rs, ComponentLink5Description=https://datasheet.ciiva.com/823/eng-cd-282836-h10-823437.pdf?src-supplier=Digikey, ComponentLink5URL=https://datasheet.ciiva.com/823/eng-cd-282836-h10-823437.pdf?src-supplier=Digikey, ComponentLink6Description=https://datasheet.ciiva.com/3141/eng-cs-1308389-eurostyle-terminal-blocks-0607-3141118.pdf?src-supplier=Avnet, ComponentLink6URL=https://datasheet.ciiva.com/3141/eng-cs-1308389-eurostyle-terminal-blocks-0607-3141118.pdf?src-supplier=Avnet, ComponentLink7Description=https://datasheet.ciiva.com/30261/eng-cs-1308389-eurostyle-terminal-blocks-0607-30261813.pdf?src-supplier=Onlinecomponents.com, ComponentLink7URL=https://datasheet.ciiva.com/30261/eng-cs-1308389-eurostyle-terminal-blocks-0607-30261813.pdf?src-supplier=Onlinecomponents.com, Connector System=5937ConnectorSystem, Connector Type=Receptacle, Contact Material=Brass, Contact Plating=Tin, Current Rating=13.5A, Depth=8.2mm, Designed by="Aslı Kurt", ELV=Compliant, Housing Color=Green, Housing Material=Polyamide, Lead Free="Lead Free", Length=10.6mm, Manufacturer Part Number=282836-2, Max Current Rating=13.5A, Max Voltage Rating (AC)=300V, Mount="Through Hole", Number of Circuits=2, Number of Contacts=2, Number of Levels=1, Number of Poles=2, Number of Positions=2, Number of Positions Per Level=2, Number of Rows=1, Operating Supply Voltage=300V, Orientation=Straight, Packaging=Tray, Pitch=5mm, Plating=Brass, Pricing 1="1=0,6, 10=0,578, 25=0,576, 50=0,5566, 100=0,4666, 300=0,43743, 600=0,41315, 1200=0,36211, 5100=0,31593 (USD)", Radiation Hardening=No, Reach SVHC Compliant=Unknown, RoHS=Yes, RoHS Compliant=Yes, Screw Flange="No (Without)", Screwless Terminal Block="No (Without)", Series=Buchanan, Side Stackable="Yes (With)", Stock 1=33835, Supplier 1=Digikey, Tail Length=3.5mm, Termination=Solder, Thread Size=M3, Voltage=300V, Voltage Rating=300V, Width=10mm, Wire Gauge (Max)=30AWG, Wire Gauge (Min)=30AWG, Wire/Cable Gauge=30AWG, Insulation Material=Nylon, Interlock="Yes (With)"
L1: library part "IND 10uH 4.8A", "10uH 10X10 4.8A - SMD Güç Bobini - SRI1004", Current=4.8A, Tolerance=20%, Inductance=10uH, ComponentLink1Description=Direncnet, ComponentLink1URL=https://www.direnc.net/10uh-10x10-48a-smd-guc-bobini-sri1004, ComponentLink2Description=Datasheet, ComponentLink2URL=https://pdf.direnc.net/upload/10uh-10x10-4-8a-smd-guc-bobini-sri1004-datasheet.pdf, DesignedBy="Aslı Kurt", Producer=CoreMaster
R1: library part "RES 0 OHM 1206", "Res Thick Film 1206 0 Ohm 5% Molded SMD Paper T/R", Case/Package=340Case, Manufacturer=Rohm, Max Current Rating=38.7A, Max Operating Temperature=155°C, Min Operating Temperature=-55°C, Resistance=0R, Supplier Part Number 1=3099053, Temperature Coefficient=100ppm/°C, Category="Chip SMD Resistors", ComponentLink1Description=https://datasheet.octopart.com/PMR18EZPJ000-Rohm-datasheet-115132289.pdf?src-supplier=Future+Electronics, ComponentLink1URL=https://datasheet.octopart.com/PMR18EZPJ000-Rohm-datasheet-115132289.pdf?src-supplier=Future+Electronics, DesignedBy="Aslı Kurt", Height=420um, Manufacturer Part Number=PMR18EZPJ000, Pricing 1="5000=0,154, 10000=0,151, 15000=0,149, 20000=0,148, 25000=0,144 (USD)", Pricing 2="1=0,94, 10=0,539, 25=0,438, 50=0,3766, 100=0,3254, 250=0,27044, 500=0,23676, 1000=0,20858 (USD)", RoHS=Yes, Stock 1=10000, Stock 2=20524, Supplier 1="Future Electronics", Supplier 2=Digikey, Supplier Part Number 2=846-PMR18EZPJ000CT-ND
R2: library part "RES 10.2K OHM 1206 1/4W", "Res Thick Film 1206 10.2K Ohm 1% 0.25W(1/4W) ±100ppm/C Pad SMD T/R", Case Code (Metric)=3216, Case Code (Imperial)=1206, Manufacturer="Yageo Group", Max Operating Temperature=155°C, Max Power Dissipation=250mW, Min Operating Temperature=-55°C, Resistance=10.2kΩ, Supplier Part Number 1=4148601, Temperature Coefficient=100ppm/°C, Tolerance=1%, Voltage Rating=200V, Case/Package=1206, Category="Chip SMD Resistors", China RoHS=Non-Compliant, ComponentLink1Description=https://datasheet.octopart.com:443/RC1206FR-0710K2L-Yageo-datasheet-175887523.pdf?src-supplier=IHS, ComponentLink1URL=https://datasheet.octopart.com:443/RC1206FR-0710K2L-Yageo-datasheet-175887523.pdf?src-supplier=IHS, ComponentLink2Description=https://datasheet.octopart.com:443/RC1206FR-0710K2L-Yageo-datasheet-103092701.pdf?src-supplier=Upverter, ComponentLink2URL=https://datasheet.octopart.com:443/RC1206FR-0710K2L-Yageo-datasheet-103092701.pdf?src-supplier=Upverter, ComponentLink3Description=https://datasheet.octopart.com:443/RC1206FR-0710K2L-Yageo-datasheet-164759695.pdf?src-supplier=Future+Electronics, ComponentLink3URL=https://datasheet.octopart.com:443/RC1206FR-0710K2L-Yageo-datasheet-164759695.pdf?src-supplier=Future+Electronics, ComponentLink4Description=https://datasheet.octopart.com:443/RC1206FR-0710K2L-Yageo-datasheet-137700087.pdf?src-supplier=Future+Electronics, ComponentLink4URL=https://datasheet.octopart.com:443/RC1206FR-0710K2L-Yageo-datasheet-137700087.pdf?src-supplier=Future+Electronics, ComponentLink5Description=https://datasheet.octopart.com:443/RC1206FR-0710K2L-Yageo-datasheet-27233761.pdf?src-supplier=Future+Electronics, ComponentLink5URL=https://datasheet.octopart.com:443/RC1206FR-0710K2L-Yageo-datasheet-27233761.pdf?src-supplier=Future+Electronics, ComponentLink6Description=https://datasheet.octopart.com:443/RC1206FR-0710K2L-Yageo-datasheet-13032847.pdf?src-supplier=Future+Electronics, ComponentLink6URL=https://datasheet.octopart.com:443/RC1206FR-0710K2L-Yageo-datasheet-13032847.pdf?src-supplier=Future+Electronics, ComponentLink7Description=https://datasheet.octopart.com:443/RC1206FR-0710K2L-Yageo-datasheet-8359522.pdf?src-supplier=Future+Electronics, ComponentLink7URL=https://datasheet.octopart.com:443/RC1206FR-0710K2L-Yageo-datasheet-8359522.pdf?src-supplier=Future+Electronics, ComponentLink8Description=https://datasheet.octopart.com:443/RC1206FR-0710K2L-Yageo-datasheet-141265859.pdf?src-supplier=TME, ComponentLink8URL=https://datasheet.octopart.com:443/RC1206FR-0710K2L-Yageo-datasheet-141265859.pdf?src-supplier=TME, ComponentLink9Description=https://datasheet.octopart.com/RC1206FR-0710K2L-Yageo-datasheet-73766026.pdf, ComponentLink9URL=https://datasheet.octopart.com/RC1206FR-0710K2L-Yageo-datasheet-73766026.pdf, ComponentLink10Description=https://datasheet.octopart.com:443/RC1206FR-0710K2L-Yageo-datasheet-118639.pdf?src-supplier=DigiKey, ComponentLink10URL=https://datasheet.octopart.com:443/RC1206FR-0710K2L-Yageo-datasheet-118639.pdf?src-supplier=DigiKey, ComponentLink11Description=http://sigma.octopart.com:80/rohs_statement/Yageo-company-2.pdf?src-supplier=Compliance+Statements, ComponentLink11URL=http://sigma.octopart.com:80/rohs_statement/Yageo-company-2.pdf?src-supplier=Compliance+Statements, ComponentLink12Description=http://sigma.octopart.com:80/conflict_mineral_statement/Yageo-company-3.pdf?src-supplier=Compliance+Statements, ComponentLink12URL=http://sigma.octopart.com:80/conflict_mineral_statement/Yageo-company-3.pdf?src-supplier=Compliance+Statements, Composition="Thick Film", Depth=1.6mm, DesignedBy="Aslı Kurt", Features="Moisture Resistant", Height=550µm, Lead Free="Lead Free", Length=3.0988mm, Lifecycle Status=Production, Manufacturer Part Number=RC1206FR-0710K2L, Military Standard=Not, Mount="Surface Mount", Number of Terminals=2, Number of Terminations=2, Packaging="Tape & Reel", Power Dissipation=250mW, Power Rating=250mW, Pricing 1="10=0,0153, 100=0,0144, 500=0,0127, 1000=0,0105, 2500=0,0081, 5000=0,0057 (EUR)", Pricing 2="500=0,0127, 1000=0,0105, 2500=0,0081, 5000=0,0057 (EUR)", Pricing 3="1=0,046, 10=0,007, 25=0,006, 250=0,006, 500=0,005, 1000=0,005, 3000=0,004, 6000=0,002 (USD)", Pricing 4="1=0,1, 10=0,013, 50=0,013, 100=0,013, 1000=0,011, 10000=0,006 (USD)", Pricing 5="10=0,018, 25=0,018, 50=0,017, 100=0,017, 250=0,016, 500=0,014, 1000=0,013 (USD)", REACH SVHC=Yes, RoHS=Compliant, Schedule B="8533210045, 8533210045|8533210045, 8533210045|8533210045|8533210045, 8533210045|8533210045|8533210045|8533210045", Stock 1=5630, Stock 2=5630, Stock 3=9063, Stock 4=6511, Stock 5=5630, Supplier 1=Farnell, Supplier 2=Farnell, Supplier 3="Arrow Electronics", Supplier 4=Mouser, Supplier 5=Newark, Supplier Part Number 2=4148601RL, Supplier Part Number 3=RC1206FR-0710K2L, Supplier Part Number 4=603-RC1206FR-0710K2L, Supplier Part Number 5=68AK7966, Termination=SMD/SMT, Voltage Rating (DC)=200V, Weight=16.187578mg, Width=1.6mm, Working Voltage=200V
R3: library part "RES 3.24K OHM 1206 1/4W", "Res Thick Film 1206 3.24K Ohm 1% 0.25W(1/4W) ±100ppm/C Pad SMD T/R", Case Code (Metric)=3216, Case Code (Imperial)=1206, Manufacturer="Yageo Group", Max Operating Temperature=155°C, Max Power Dissipation=250mW, Min Operating Temperature=-55°C, Resistance=3.24kΩ, Supplier Part Number 1=4013462, Temperature Coefficient=100ppm/°C, Tolerance=1%, Voltage Rating=200V, Case/Package=1206, Category="Chip SMD Resistors", China RoHS=Non-Compliant, ComponentLink1Description=https://datasheet.octopart.com:443/RC1206FR-073K24L-Yageo-datasheet-175887523.pdf?src-supplier=IHS, ComponentLink1URL=https://datasheet.octopart.com:443/RC1206FR-073K24L-Yageo-datasheet-175887523.pdf?src-supplier=IHS, ComponentLink2Description=https://datasheet.octopart.com:443/RC1206FR-073K24L-Yageo-datasheet-103092701.pdf?src-supplier=Upverter, ComponentLink2URL=https://datasheet.octopart.com:443/RC1206FR-073K24L-Yageo-datasheet-103092701.pdf?src-supplier=Upverter, ComponentLink3Description=https://datasheet.octopart.com:443/RC1206FR-073K24L-Yageo-datasheet-164759695.pdf?src-supplier=Future+Electronics, ComponentLink3URL=https://datasheet.octopart.com:443/RC1206FR-073K24L-Yageo-datasheet-164759695.pdf?src-supplier=Future+Electronics, ComponentLink4Description=https://datasheet.octopart.com:443/RC1206FR-073K24L-Yageo-datasheet-137700087.pdf?src-supplier=Future+Electronics, ComponentLink4URL=https://datasheet.octopart.com:443/RC1206FR-073K24L-Yageo-datasheet-137700087.pdf?src-supplier=Future+Electronics, ComponentLink5Description=https://datasheet.octopart.com:443/RC1206FR-073K24L-Yageo-datasheet-27233761.pdf?src-supplier=Future+Electronics, ComponentLink5URL=https://datasheet.octopart.com:443/RC1206FR-073K24L-Yageo-datasheet-27233761.pdf?src-supplier=Future+Electronics, ComponentLink6Description=https://datasheet.octopart.com:443/RC1206FR-073K24L-Yageo-datasheet-13032847.pdf?src-supplier=Future+Electronics, ComponentLink6URL=https://datasheet.octopart.com:443/RC1206FR-073K24L-Yageo-datasheet-13032847.pdf?src-supplier=Future+Electronics, ComponentLink7Description=https://datasheet.octopart.com:443/RC1206FR-073K24L-Yageo-datasheet-8359522.pdf?src-supplier=Future+Electronics, ComponentLink7URL=https://datasheet.octopart.com:443/RC1206FR-073K24L-Yageo-datasheet-8359522.pdf?src-supplier=Future+Electronics, ComponentLink8Description=https://datasheet.octopart.com:443/RC1206FR-073K24L-Yageo-datasheet-141265859.pdf?src-supplier=TME, ComponentLink8URL=https://datasheet.octopart.com:443/RC1206FR-073K24L-Yageo-datasheet-141265859.pdf?src-supplier=TME, ComponentLink9Description=https://datasheet.octopart.com/RC1206FR-073K24L-Yageo-datasheet-73766026.pdf, ComponentLink9URL=https://datasheet.octopart.com/RC1206FR-073K24L-Yageo-datasheet-73766026.pdf, ComponentLink10Description=https://datasheet.octopart.com:443/RC1206FR-073K24L-Yageo-datasheet-118639.pdf?src-supplier=DigiKey, ComponentLink10URL=https://datasheet.octopart.com:443/RC1206FR-073K24L-Yageo-datasheet-118639.pdf?src-supplier=DigiKey, ComponentLink11Description=http://sigma.octopart.com:80/rohs_statement/Yageo-company-2.pdf?src-supplier=Compliance+Statements, ComponentLink11URL=http://sigma.octopart.com:80/rohs_statement/Yageo-company-2.pdf?src-supplier=Compliance+Statements, ComponentLink12Description=http://sigma.octopart.com:80/conflict_mineral_statement/Yageo-company-3.pdf?src-supplier=Compliance+Statements, ComponentLink12URL=http://sigma.octopart.com:80/conflict_mineral_statement/Yageo-company-3.pdf?src-supplier=Compliance+Statements, Composition="Thick Film", Contact Plating=Tin, Depth=1.6mm, DesignedBy="Aslı Kurt", Features="Moisture Resistant", Height=550µm, Lead Free="Lead Free", Length=3.0988mm, Lifecycle Status=Production, Manufacturer Part Number=RC1206FR-073K24L, Military Standard=Not, Mount="Surface Mount", Number of Terminals=2, Number of Terminations=2, Packaging="Tape & Reel", Power Dissipation=250mW, Power Rating=250mW, Pricing 1="10=0,0139, 100=0,0113, 500=0,0097, 1000=0,008, 2500=0,0065, 5000=0,0049 (EUR)", Pricing 2="1=0,1, 10=0,011, 50=0,011, 100=0,011, 1000=0,010, 10000=0,005 (USD)", Pricing 3="10=0,018, 25=0,017, 50=0,016, 100=0,015, 500=0,014, 1000=0,012, 5000=0,007 (USD)", Radiation Hardening=No, REACH SVHC=Yes, RoHS=Compliant, Schedule B="8533210045, 8533210045|8533210045, 8533210045|8533210045|8533210045, 8533210045|8533210045|8533210045|8533210045", Stock 1=4050, Stock 2=45537, Stock 3=4050, Supplier 1=Farnell, Supplier 2=Mouser, Supplier 3=Newark, Supplier Part Number 2=603-RC1206FR-073K24L, Supplier Part Number 3=46AK5288, Termination=SMD/SMT, Voltage Rating (DC)=200V, Width=1.6mm, Working Voltage=200V
R4: library part "RES 33K OHM 1206", "SMD Chip Resistor, 33 kOhm, ï¿½ 5%, 250 mW, 1206 [3216 Metric], Thick Film, General Purpose", Manufacturer=Yageo, Manufacturer Part Number=RC1206JR-0733KL, Resistance=33kR, Supplier Part Number 1=311-33KERCT-ND, Voltage Rating (AC)=200V, Category="Chip SMD Resistors", ComponentLink1Description=https://datasheet.ciiva.com/29181/402729-da-01-en-smd-widerstand-chip1206-33-kohm-29181369.pdf?src-supplier=Conrad, ComponentLink1URL=https://datasheet.ciiva.com/29181/402729-da-01-en-smd-widerstand-chip1206-33-kohm-29181369.pdf?src-supplier=Conrad, ComponentLink2Description=https://datasheet.ciiva.com/7857/444357-7857487.pdf?src-supplier=Element14, ComponentLink2URL=https://datasheet.ciiva.com/7857/444357-7857487.pdf?src-supplier=Element14, ComponentLink3Description=https://datasheet.ciiva.com/16747/pyu-rc1206-51-rohs-l-4-16747052.pdf?src-supplier=Future+Electronics, ComponentLink3URL=https://datasheet.ciiva.com/16747/pyu-rc1206-51-rohs-l-4-16747052.pdf?src-supplier=Future+Electronics, DesignedBy="Aslı Kurt", Lead Free=5697LeadFree, Pricing 1="1=0,1, 10=0,023, 50=0,0184, 100=0,0133, 500=0,01122, 1000=0,00918 (USD)", Pricing 2="5000=0,0036, 20000=0,0035, 75000=0,0033, 200000=0,0032, 500000=0,0031 (USD)", RoHS=Yes, Stock 1=425111, Stock 2=75000, Supplier 1=Digikey, Supplier 2="Future Electronics", Supplier Part Number 2=1124239